# Altium PCB HeartBlink.PcbDoc
Units mm, origin at the board's own origin, x right, y up, seen from the top; angles counter-clockwise.
Board outline 106.64 x 98.31 mm, 2 copper layers (Top Layer, Bottom Layer); 51 components, 41 nets, 113 pads, 0 vias.
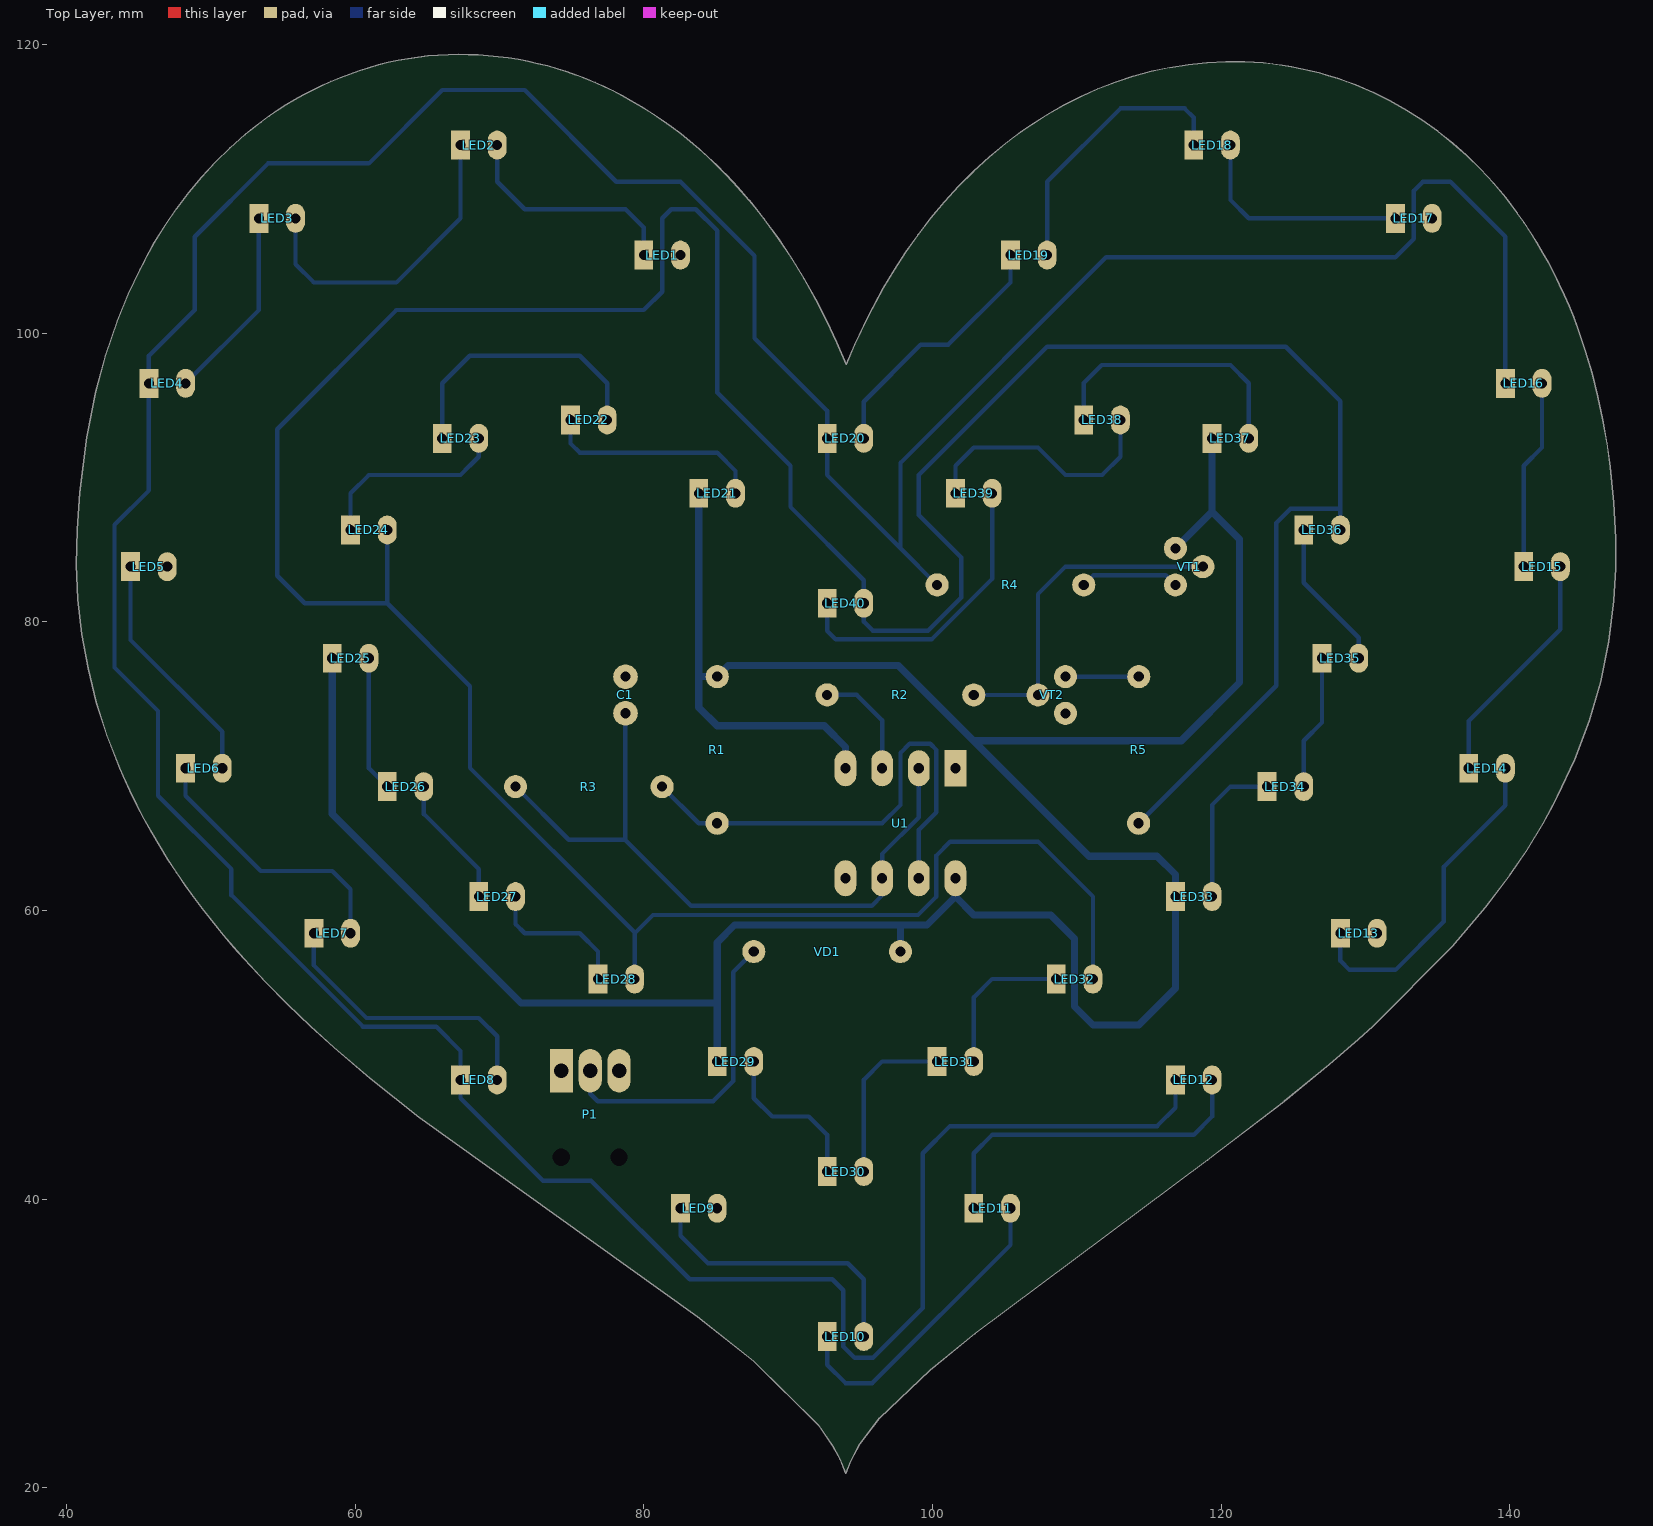
[diagram p0: Top Layer view]
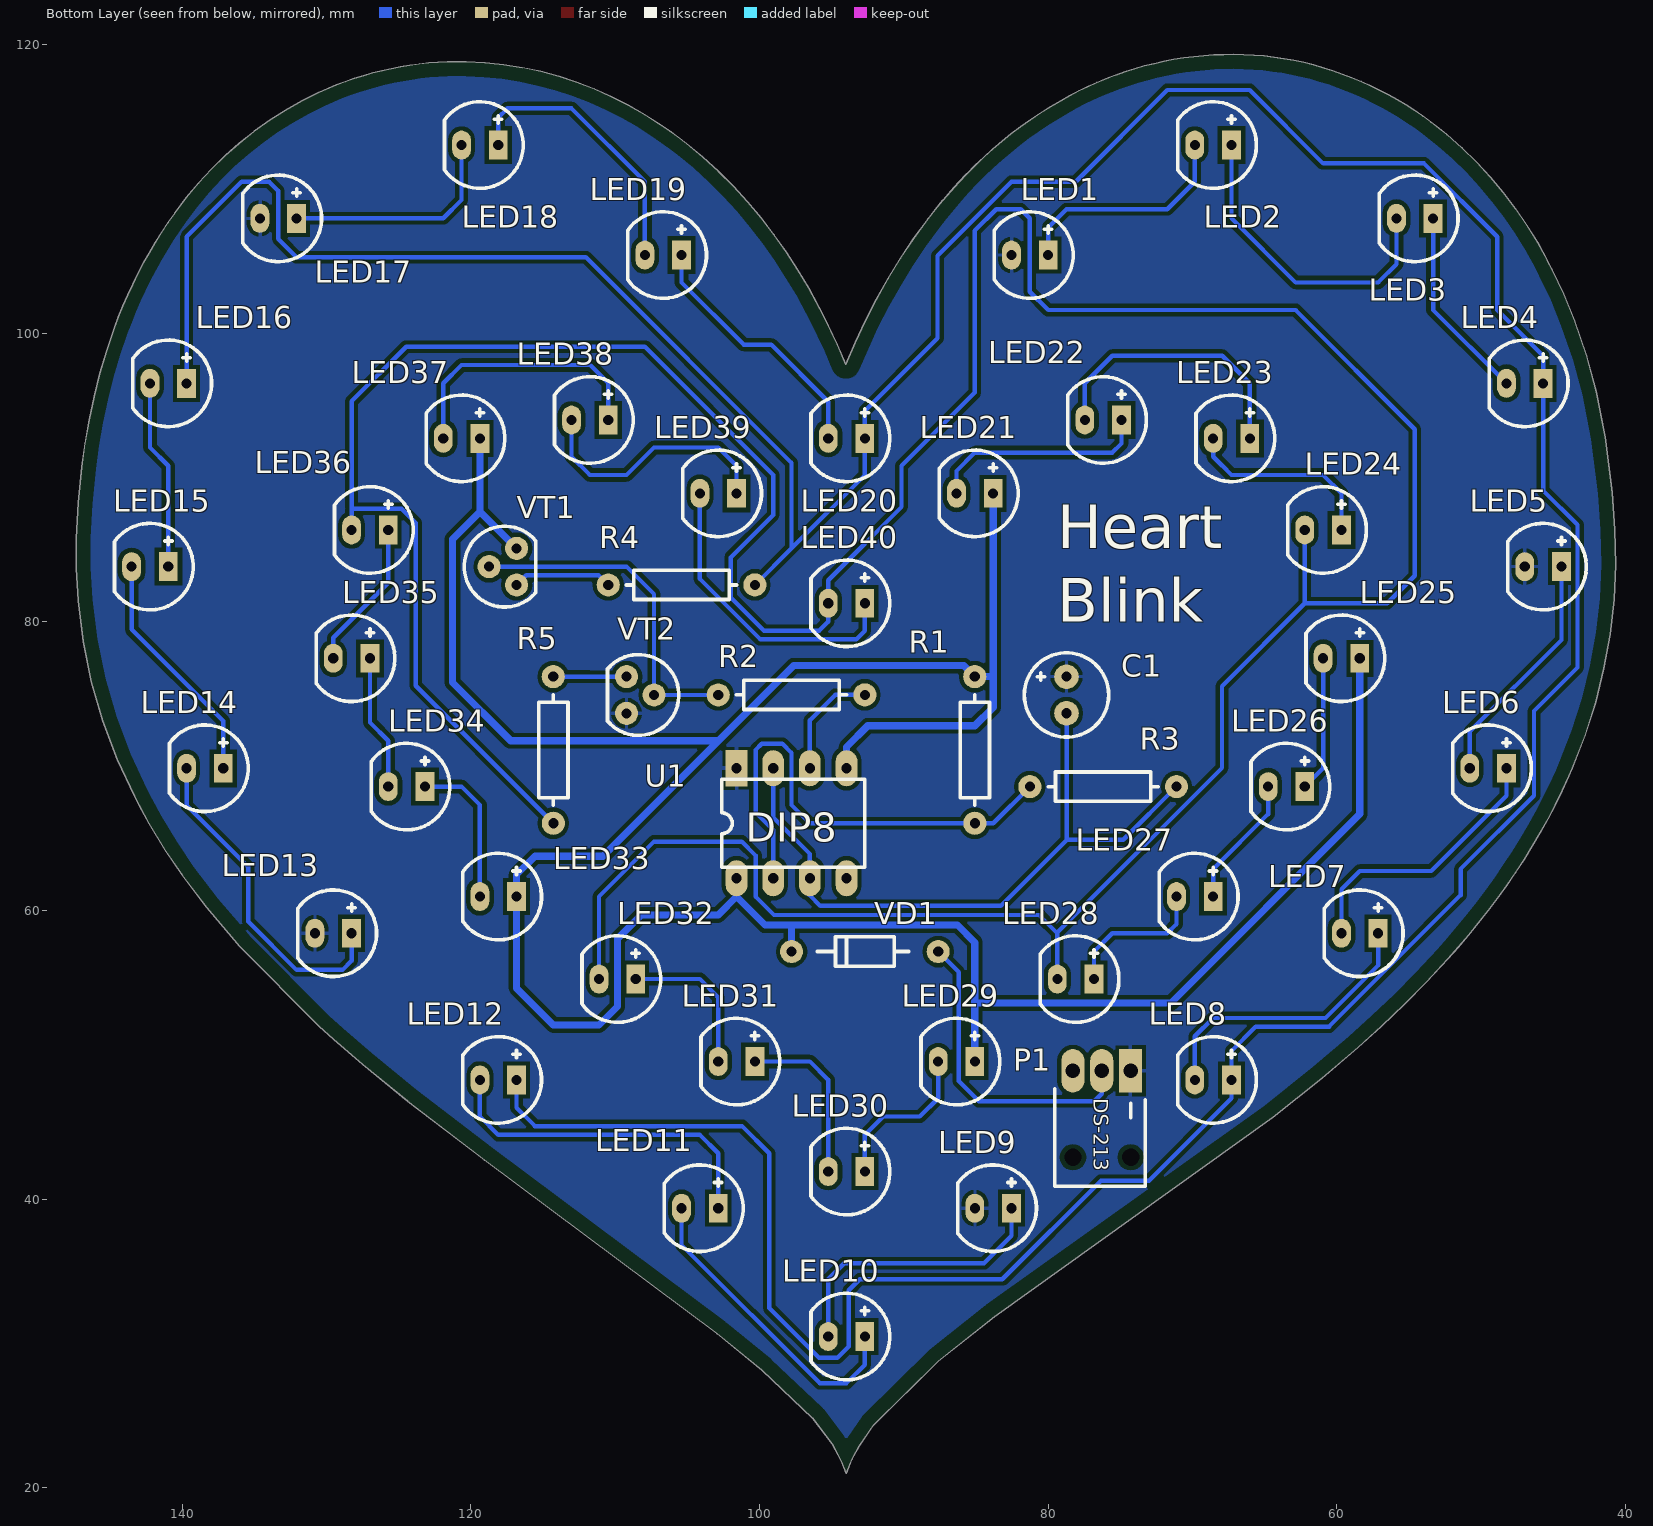
[diagram p1: Bottom Layer view, seen from below]

## Layer stack, top to bottom
Top Solder: solder mask 0.0102, Solder Resist, Dk 3.5
Top Layer: signal copper 0.0356
Dielectric 1: dielectric 0.32, FR-4, Dk 4.8
Bottom Layer: signal copper 0.0356
Bottom Solder: solder mask 0.0102, Solder Resist, Dk 3.5

## Board outline
43.692,69.85 42.817,72.105 42.086,74.412 41.503,76.761 41.075,79.143 40.805,81.548 40.698,83.965 40.761,86.385 40.925,88.954 41.406,92.793 42.04,95.954 42.713,98.441 43.543,100.878 44.274,102.667 45.102,104.416 45.419,105.039 46.099,106.264 46.837,107.458 47.63,108.618 48.478,109.739 49.38,110.817 50.333,111.849 51.336,112.83 52.388,113.757 52.932,114.199 53.487,114.625 54.054,115.036 54.632,115.431 55.221,115.809 55.821,116.17 56.431,116.513 57.052,116.838 57.683,117.144 58.325,117.432 58.976,117.699 59.637,117.947 60.296,118.182 60.961,118.394 61.632,118.584 62.309,118.751 62.99,118.896 63.676,119.019 64.364,119.12 65.056,119.199 65.75,119.257 66.445,119.293 67.141,119.308 67.838,119.301 68.534,119.274 69.229,119.226 69.923,119.157 70.614,119.067 71.303,118.957 71.988,118.827 72.67,118.677 73.346,118.507 74.018,118.318 74.683,118.108 75.342,117.88 75.994,117.632 76.638,117.365 77.274,117.079 77.901,116.774 78.518,116.451 79.124,116.109 79.846,115.688 80.552,115.247 81.242,114.785 81.917,114.304 82.576,113.805 83.22,113.287 83.848,112.751 84.462,112.198 85.06,111.63 85.643,111.045 86.212,110.446 86.766,109.832 87.305,109.205 87.829,108.564 88.34,107.911 89.317,106.571 90.238,105.189 91.104,103.77 91.915,102.319 92.673,100.842 93.377,99.344 94.03,97.83 94.606,99.177 95.553,101.167 96.601,103.109 97.356,104.372 98.156,105.606 99.003,106.808 99.897,107.973 100.837,109.099 101.825,110.182 102.86,111.22 103.944,112.207 105.077,113.142 105.661,113.588 106.258,114.02 106.868,114.437 107.963,115.144 109.095,115.793 110.259,116.383 111.452,116.913 112.67,117.382 113.912,117.787 115.171,118.127 116.447,118.401 117.734,118.606 119.03,118.742 120.332,118.806 121.635,118.797 122.286,118.765 122.936,118.714 123.585,118.644 124.233,118.554 124.878,118.446 125.527,118.324 126.171,118.182 126.81,118.022 127.443,117.843 128.071,117.645 128.692,117.43 129.306,117.197 130.514,116.679 131.692,116.095 132.837,115.448 133.947,114.74 135.019,113.975 136.05,113.155 137.039,112.283 137.981,111.362 138.876,110.396 139.719,109.386 140.509,108.335 140.987,107.658 141.444,106.969 141.882,106.27 142.301,105.56 142.701,104.84 143.081,104.111 143.444,103.373 143.788,102.627 144.114,101.872 144.423,101.11 144.714,100.341 145.246,98.782 145.712,97.201 146.115,95.601 146.457,93.985 146.741,92.356 146.968,90.72 147.208,88.257 147.335,85.796 147.335,83.718 147.211,81.449 146.86,78.632 146.293,75.85 145.511,73.122 144.515,70.465 143.306,67.895 142.983,67.261 142.303,66.017 141.202,64.202 140.013,62.447 138.308,60.193 136.013,57.499 130.529,51.973 129.527,51.081 127.495,49.332 124.384,46.788 119.074,42.704 102.961,30.683 99.84,28.151 96.329,24.822 94.978,23.029 94.364,21.903 94,21 93.599,21.983 93.105,22.908 92.109,24.34 87.609,28.782 83.733,31.852 64.438,45.669 61.036,48.378 58.544,50.505 56.922,51.972 55.34,53.481 53.804,55.034 52.32,56.633 51.599,57.45 50.895,58.28 50.206,59.123 49.534,59.978 48.88,60.846 48.245,61.728 47.63,62.623 47.034,63.533 46.46,64.456 45.908,65.394 45.378,66.347 44.872,67.314 44.39,68.297 43.933,69.295

## Design rules (kind name [scope] priority, off if disabled: settings)
BoardOutlineClearance [All] p1: gap=1 ignorepadtopadclearanceinfootprint=FALSE
Clearance [All] p1: gap=0.3 ignorepadtopadclearanceinfootprint=FALSE
ComponentOrientations [All] p1: allowedrotations=32
Height [All] p1: minheight=0 maxheight=30 prefheight=12.7
HoleSize [All] p1: absolutevalues=TRUE maxlimit=5 minlimit=0.2 maxpercent=80.000 minpercent=20.000
HoleToHoleClearance [All] p1: gap=0.3 allowstackedmicrovias=TRUE
MinimumSolderMaskSliver [All] p1: minsoldermaskwidth=0.1
PolygonConnect [All] p1: connectstyle=Relief reliefconductorwidth=0.254 reliefentries=4 polygonreliefangle="90 Angle" airgapwidth=0.254
RoutingVias [All] p1: holewidth=0.711 width=1.27 viastyle="Through Hole" minholewidth=0.711 minwidth=1.27 maxholewidth=0.711 maxwidth=1.27
SilkToSilkClearance [All] p1: silktosilkclearance=0.3
SilkToSolderMaskClearance [IsPad] p1: minsilkscreentomaskgap=0.3 clearancetoexposedcopper=TRUE
SolderMaskExpansion [All] p1: expansion=0.102
UnRoutedNet [All] p1: checkbadconnections=TRUE
Width [All] p1: maxlimit=0.5 minlimit=0.3 preferedwidth=0.3
23 further rules are at their usual default settings.

## Components (designator, comment, footprint, x,y, rotation, side; value= is the part's Value field where it differs from the comment)
C1 "22uF" CAP_POL2.5 78.74,76.199 r270 top
LED1 "L1503" LED2.54-5MM-RED 80.01,105.41 r0 top
LED2 "L1503" LED2.54-5MM-RED 67.31,113.03 r0 top
LED3 "L1503" LED2.54-5MM-RED 53.34,107.95 r0 top
LED4 "L1503" LED2.54-5MM-RED 45.72,96.52 r0 top
LED5 "L1503" LED2.54-5MM-RED 44.45,83.82 r0 top
LED6 "L1503" LED2.54-5MM-RED 48.26,69.85 r0 top
LED7 "L1503" LED2.54-5MM-RED 57.15,58.42 r0 top
LED8 "L1503" LED2.54-5MM-RED 67.31,48.26 r0 top
LED9 "L1503" LED2.54-5MM-RED 82.55,39.37 r0 top
LED10 "L1503" LED2.54-5MM-RED 92.71,30.48 r0 top
LED11 "L1503" LED2.54-5MM-RED 102.87,39.37 r0 top
LED12 "L1503" LED2.54-5MM-RED 116.84,48.26 r0 top
LED13 "L1503" LED2.54-5MM-RED 128.27,58.42 r0 top
LED14 "L1503" LED2.54-5MM-RED 137.16,69.85 r0 top
LED15 "L1503" LED2.54-5MM-RED 140.97,83.82 r0 top
LED16 "L1503" LED2.54-5MM-RED 139.7,96.52 r0 top
LED17 "L1503" LED2.54-5MM-RED 132.08,107.95 r0 top
LED18 "L1503" LED2.54-5MM-RED 118.11,113.03 r0 top
LED19 "L1503" LED2.54-5MM-RED 105.41,105.41 r0 top
LED20 "L1503" LED2.54-5MM-RED 92.71,92.71 r0 top
LED21 "L1503" LED2.54-5MM-RED 83.82,88.9 r0 top
LED22 "L1503" LED2.54-5MM-RED 74.93,93.98 r0 top
LED23 "L1503" LED2.54-5MM-RED 66.04,92.71 r0 top
LED24 "L1503" LED2.54-5MM-RED 59.69,86.36 r0 top
LED25 "L1503" LED2.54-5MM-RED 58.42,77.47 r0 top
LED26 "L1503" LED2.54-5MM-RED 62.23,68.58 r0 top
LED27 "L1503" LED2.54-5MM-RED 68.58,60.96 r0 top
LED28 "L1503" LED2.54-5MM-RED 76.835,55.245 r0 top
LED29 "L1503" LED2.54-5MM-RED 85.09,49.53 r0 top
LED30 "L1503" LED2.54-5MM-RED 92.71,41.91 r0 top
LED31 "L1503" LED2.54-5MM-RED 100.33,49.53 r0 top
LED32 "L1503" LED2.54-5MM-RED 108.585,55.245 r0 top
LED33 "L1503" LED2.54-5MM-RED 116.84,60.96 r0 top
LED34 "L1503" LED2.54-5MM-RED 123.19,68.58 r0 top
LED35 "L1503" LED2.54-5MM-RED 127,77.47 r0 top
LED36 "L1503" LED2.54-5MM-RED 125.73,86.36 r0 top
LED37 "L1503" LED2.54-5MM-RED 119.38,92.71 r0 top
LED38 "L1503" LED2.54-5MM-RED 110.49,93.98 r0 top
LED39 "L1503" LED2.54-5MM-RED 101.6,88.9 r0 top
LED40 "L1503" LED2.54-5MM-RED 92.71,81.28 r0 top
P1 "DS-213" DS-213 74.295,48.895 r90 top
R1 "20K" AXIAL10R 85.093,66.039 r90 top
R2 "1K" AXIAL10R 92.71,74.933 r0 top
R3 "8.2K" AXIAL10R 81.28,68.577 r180 top
R4 "22" AXIAL10R 100.33,82.553 r0 top
R5 "22" AXIAL10R 114.297,66.04 r90 top
U1 "NE555" DIP8 101.6,69.85 r270 top
VD1 "1N4148" AXIAL10D-TR 87.629,57.151 r0 top
VT1 "BC547" TO-92T 116.84,85.09 r270 top
VT2 "BC327-25" TO-92T 109.22,73.659 r90 top

## Footprints (in the part's own frame and the unit in brackets; to place one, negate y for a bottom-side part, rotate by r counter-clockwise, add the part's x,y. Pads: shape width x height; smd on the part's side, far side on the other; paste and mask are expansions set on the pad)
AXIAL10D-TR [mm]
  round 1.6 hole 0.7: 1(0,-0.001) 2(10.161,-0.001)
  body extent -0.2,-0.88 10.36,0.86, height 1.76
AXIAL10R [mm]
  round 1.6 hole 0.7: 1(0.001,0.003) 2(10.16,-0.003)
  body extent -0.25,-1.51 10.41,1.53, height 3.05
CAP_POL2.5 [mm]
  round 1.7 hole 0.7: 1(0,0) 2(2.54,0)
  body extent -1.27,-2.54 3.87,2.54, height 11
DIP8 [mm]
  rect 2.5x1.5 hole 0.7: 1(0,0)
  oval 2.5x1.5 hole 0.7: 2(0,-2.54) 3(0,-5.08) 4(0,-7.62) 5(7.62,-7.62) 6(7.62,-5.08) 7(7.62,-2.54) 8(7.62,0)
  body extent -0.13,-8.89 7.75,1.27, height 3.05
DS-213 [mm]
  oval 3x1.6 hole 1: 1(0,-2) 3(0,-4)
  rect 3x1.6 hole 1: 2(0,0)
  round 0 hole 1.2: 14(-6,0) 15(-6,-4)
  body extent -8,-5.25 1,1, height 5
LED2.54-5MM-RED [mm]
  rect 1.3x2 hole 0.7: 1(0,0)
  oval 1.3x2 hole 0.7: 2(2.54,0)
  body extent -1.53,-2.8 4.07,2.8, height 6.77
TO-92T [mm]
  round 1.6 hole 0.7: 1(0,0) 2(1.27,1.905) 3(2.54,0)
  body extent -1.24,-0.79 3.79,3.63, height 7

## Part data
C1: library part Cap_Pol
LED1 LED2 LED3 LED4 LED5 LED6 LED7 LED8 LED9 LED10 LED11 LED12 LED13 LED14 LED15 LED16 LED17 LED18 LED19 LED20 LED21 LED22 LED23 LED24 LED25 LED26 LED27 LED28 LED29 LED30 LED31 LED32 LED33 LED34 LED35 LED36 LED37 LED38 LED39 LED40: library part Led, Name=L1503
P1: library part CHOP2_P, Name=DS-213
R1 R2 R3 R4 R5: library part Res
VD1: library part Diode_Sc, Name=1N4148
VT1: library part NPN_CBE, Name=BC547
VT2: library part PNP_CBE, Name=BC327-25
U1: Name=NE555

## Nets (pads, with @x,y where several pads share a name; then routed paths per layer and width w, separated by ;. In a path a pad name is that pad's centre, name@x,y a point inside that pad or via, vN(x,y) a via of type N, cw(c..) or ccw(c..) an arc to the next point about the centre after c; other vN are vias at no path point)
GND: C1.1 LED1.2 LED5.2 LED9.2 LED13.2 LED17.2 P1.2 U1.1 VT2.1
NetC1_2: C1.2 R3.2 U1.2 U1.6 | length 47.8
  Bottom Layer w0.3: R3.2 74.803,64.897 78.715,64.897 ; C1.2 78.715,73.659 78.715,64.897 ; U1.2 99.06,66.446 96.52,63.906 U1.6 96.52,61.035 95.81,60.325 83.287,60.325 78.715,64.897
NetLED1_1: LED1.1 LED2.2 | length 15.9
  Bottom Layer w0.3: LED2.2 69.85,110.49 71.755,108.585 78.74,108.585 80.01,107.315 LED1.1
NetLED2_1: LED2.1 LED3.2 | length 22.1
  Bottom Layer w0.3: LED3.2 55.88,104.775 57.15,103.505 62.865,103.505 67.31,107.95 LED2.1
NetLED3_1: LED3.1 LED4.2 | length 13.5
  Bottom Layer w0.3: LED4.2 53.34,101.6 LED3.1
NetLED4_1: LED4.1 LED8.1 LED12.1 LED16.1 LED20.1 R4.1 | length 294.9
  Bottom Layer w0.3: R4.1 97.79,85.097 ; LED12.1 116.84,46.33 115.57,45.06 101.219,45.06 99.339,43.18 99.339,32.461 95.885,29.007 94.615,29.007 93.828,29.794 93.828,33.68 93.066,34.442 83.185,34.442 76.352,41.275 73.025,41.275 67.31,46.99 LED8.1 67.31,50.267 65.624,51.953 60.544,51.953 51.435,61.062 51.435,62.865 46.355,67.945 46.355,73.812 43.332,76.835 43.332,86.716 45.72,89.103 LED4.1 45.72,98.425 48.895,101.6 48.895,106.68 53.975,111.76 60.96,111.76 66.04,116.84 71.755,116.84 78.105,110.49 82.55,110.49 87.681,105.359 87.681,99.644 92.71,94.615 LED20.1 92.71,90.177 97.79,85.097 ; LED16.1 139.7,106.68 135.89,110.49 133.985,110.49 133.35,109.855 133.35,106.528 132.08,105.258 112.039,105.258 97.79,91.008 97.79,85.097
NetLED5_1: LED5.1 LED6.2 | length 16.6
  Bottom Layer w0.3: LED5.1 44.45,78.74 50.8,72.39 LED6.2
NetLED6_1: LED6.1 LED7.2 | length 19.1
  Bottom Layer w0.3: LED6.1 48.26,67.945 53.467,62.738 58.42,62.738 59.69,61.468 LED7.2
NetLED7_1: LED7.1 LED8.2 | length 20
  Bottom Layer w0.3: LED7.1 57.15,56.195 60.793,52.553 68.58,52.553 69.85,51.283 LED8.2
NetLED9_1: LED9.1 LED10.2 | length 19.8
  Bottom Layer w0.3: LED9.1 82.55,37.465 84.455,35.56 94.132,35.56 95.25,34.442 LED10.2
NetLED10_1: LED10.1 LED11.2 | length 21.7
  Bottom Layer w0.3: LED10.1 92.71,28.524 93.98,27.254 95.834,27.254 105.41,36.83 LED11.2
NetLED11_1: LED11.1 LED12.2 | length 23.9
  Bottom Layer w0.3: LED11.1 102.87,43.18 104.14,44.45 118.11,44.45 119.38,45.72 LED12.2
NetLED13_1: LED13.1 LED14.2 | length 23.1
  Bottom Layer w0.3: LED13.1 128.27,56.515 128.905,55.88 132.08,55.88 135.433,59.233 135.433,63.017 139.7,67.285 LED14.2
NetLED14_1: LED14.1 LED15.2 | length 16.6
  Bottom Layer w0.3: LED14.1 137.16,73.127 143.51,79.477 LED15.2
NetLED15_1: LED15.1 LED16.2 | length 13.2
  Bottom Layer w0.3: LED15.1 140.97,90.805 142.24,92.075 LED16.2
NetLED17_1: LED17.1 LED18.2 | length 15.8
  Bottom Layer w0.3: LED18.2 120.65,109.22 121.92,107.95 LED17.1
NetLED18_1: LED18.1 LED19.2 | length 19.5
  Bottom Layer w0.3: LED19.2 107.95,110.49 113.03,115.57 117.475,115.57 118.11,114.935 LED18.1
NetLED19_1: LED19.1 LED20.2 | length 18
  Bottom Layer w0.3: LED20.2 95.25,95.25 99.187,99.187 101.092,99.187 105.41,103.505 LED19.1
NetLED21_2: LED21.2 LED22.1 | length 15.4
  Bottom Layer w0.3: LED22.1 74.93,92.354 75.565,91.719 85.09,91.719 86.36,90.449 LED21.2
NetLED22_2: LED22.2 LED23.1 | length 19.4
  Bottom Layer w0.3: LED23.1 66.04,96.52 67.945,98.425 75.565,98.425 77.47,96.52 LED22.2
NetLED23_2: LED23.2 LED24.1 | length 13.8
  Bottom Layer w0.3: LED24.1 59.69,88.9 60.96,90.17 67.303,90.17 67.938,90.805 67.945,90.805 68.58,91.44 LED23.2
NetLED24_2: LED24.2 LED28.2 LED32.2 LED36.2 LED40.2 R5.1 | length 262.4
  Bottom Layer w0.3: LED24.2 62.23,81.28 ; LED28.2 79.375,58.471 ; LED32.2 111.125,60.96 107.315,64.77 101.244,64.77 100.279,63.805 100.279,60.96 99.009,59.69 80.645,59.69 79.426,58.471 79.375,58.471 ; R5.1 123.825,75.572 123.825,86.843 124.816,87.833 128.231,87.833 ; LED36.2 128.27,87.794 128.231,87.833 ; 62.23,81.28 56.515,81.28 54.61,83.185 54.61,93.345 62.866,101.601 80.01,101.601 81.28,102.871 81.28,107.95 81.915,108.585 83.606,108.585 85.09,107.101 85.09,95.885 90.17,90.805 90.17,87.96 95.25,82.88 LED40.2 95.25,80.01 95.879,79.381 99.701,79.381 102.006,81.686 102.006,84.455 99.06,87.401 99.06,90.17 107.95,99.06 124.485,99.06 128.27,95.275 128.27,87.872 128.231,87.833 ; 62.23,81.28 67.97,75.54 67.97,69.875 79.375,58.471
NetLED25_2: LED25.2 LED26.1 | length 9.4
  Bottom Layer w0.3: LED25.2 60.96,69.85 LED26.1
NetLED26_2: LED26.2 LED27.1 | length 9.2
  Bottom Layer w0.3: LED26.2 64.77,66.675 68.58,62.865 LED27.1
NetLED27_2: LED27.2 LED28.1 | length 10.3
  Bottom Layer w0.3: LED27.2 71.12,59.055 71.755,58.42 75.565,58.42 76.835,57.15 LED28.1
NetLED29_2: LED29.2 LED30.1 | length 11.2
  Bottom Layer w0.3: LED29.2 87.63,46.99 88.9,45.72 91.441,45.72 92.711,44.45 92.71,44.449 92.71,43.818 92.711,43.816 92.71,43.815 LED30.1
NetLED30_2: LED30.2 LED31.1 | length 12
  Bottom Layer w0.3: LED30.2 95.25,48.26 96.52,49.53 LED31.1
NetLED31_2: LED31.2 LED32.1 | length 10.7
  Bottom Layer w0.3: LED31.2 102.87,53.975 104.14,55.245 LED32.1
NetLED33_2: LED33.2 LED34.1 | length 10.7
  Bottom Layer w0.3: LED33.2 119.38,67.31 120.65,68.58 LED34.1
NetLED34_2: LED34.2 LED35.1 | length 9.4
  Bottom Layer w0.3: LED34.2 125.73,71.755 127,73.025 LED35.1
NetLED35_2: LED35.2 LED36.1 | length 10.5
  Bottom Layer w0.3: LED36.1 125.73,82.702 129.54,78.892 LED35.2
NetLED37_2: LED37.2 LED38.1 | length 18.8
  Bottom Layer w0.3: LED38.1 110.49,96.545 111.735,97.79 120.65,97.79 121.92,96.52 LED37.2
NetLED38_2: LED38.2 LED39.1 | length 17.7
  Bottom Layer w0.3: LED39.1 101.6,90.805 102.87,92.075 107.322,92.075 109.227,90.17 111.76,90.17 113.03,91.44 LED38.2
NetLED39_2: LED39.2 LED40.1 | length 21.2
  Bottom Layer w0.3: LED40.1 92.71,79.375 93.304,78.781 99.95,78.781 104.14,82.971 LED39.2
NetP1_1: P1.1 VD1.1 | length 21.8
  Bottom Layer w0.3: P1.1 76.295,47.307 76.816,46.787 84.811,46.787 86.208,48.184 86.208,55.729 VD1.1
NetR1_1: R1.1 R3.1 U1.7 | length 34
  Bottom Layer w0.3: R3.1 83.813,66.04 R1.1 96.52,66.04 97.79,67.31 97.79,70.917 98.425,71.552 99.847,71.552 100.279,71.12 100.279,66.802 99.06,65.583 U1.7
NetR2_1: R2.1 U1.3 | length 7.9
  Bottom Layer w0.3: R2.1 94.76,74.936 96.52,73.176 U1.3
NetR2_2: R2.2 VT1.2 VT2.2 | length 23.7
  Bottom Layer w0.3: R2.2 105.08,74.93 105.081,74.929 VT2.2 107.315,81.915 109.22,83.82 VT1.2
NetR4_2: R4.2 VT1.3 | length 6.9
  Bottom Layer w0.3: R4.2 111.16,83.22 116.17,83.22 VT1.3
NetR5_2: R5.2 VT2.3 | length 5.1
  Bottom Layer w0.3: VT2.3 111.735,76.199 111.736,76.2 R5.2
VCC: LED21.1 LED25.1 LED29.1 LED33.1 LED37.1 R1.2 U1.4 U1.8 VD1.2 VT1.1 | length 211
  Bottom Layer w0.5: LED25.1 58.42,66.675 71.501,53.594 85.09,53.594 ; LED21.1 83.82,76.2 ; LED29.1 85.09,53.594 ; U1.4 93.98,71.321 92.504,72.796 85.09,72.796 83.82,74.066 83.82,76.2 ; VD1.2 97.79,58.928 97.852,58.99 ; U1.8 101.6,60.96 ; VT1.1 119.38,87.63 ; LED37.1 119.38,87.63 ; 83.82,76.2 83.821,76.199 R1.2 85.859,76.962 97.638,76.962 102.845,71.755 ; 85.09,53.594 85.09,57.785 86.295,58.99 97.852,58.99 ; 97.852,58.99 99.63,58.99 101.6,60.96 ; 101.6,60.96 102.87,59.69 108.204,59.69 109.855,58.039 109.855,53.34 111.125,52.07 114.3,52.07 116.84,54.61 LED33.1 116.84,62.484 115.57,63.754 110.846,63.754 102.845,71.755 ; 102.845,71.755 117.246,71.755 121.285,75.794 121.285,85.725 119.38,87.63
pads on no net: P1.3 P1.14 P1.15 U1.5

## Polygon pours and split planes (outlines as drawn)
GND on Bottom Layer "GND_L02_P003" (solid, pour order 3): 207 vertices, not listed, extent 40.698,21 147.335,119.308

## Silkscreen, mask and mechanical layers (free items; w line width, h text height)
Bottom Overlay:
  text "Heart" at 79.375,85.09 h3
  text "Blink" at 79.375,80.01 h3
Mechanical 1:
  drawing of 206 lines, arcs and shapes, not listed

## Text inside footprints (layer, text, board x,y; h text height)
U1: Bottom Overlay "DIP8" at 100.965,64.77 h2